# Altium PCB FinalBoard.PcbDoc
Units mil, origin at the board's own origin, x right, y up, seen from the top; angles counter-clockwise.
Board outline 2210 x 1505 mil, 2 copper layers (Top Layer, Bottom Layer); 39 components, 30 nets, 152 pads, 21 vias.
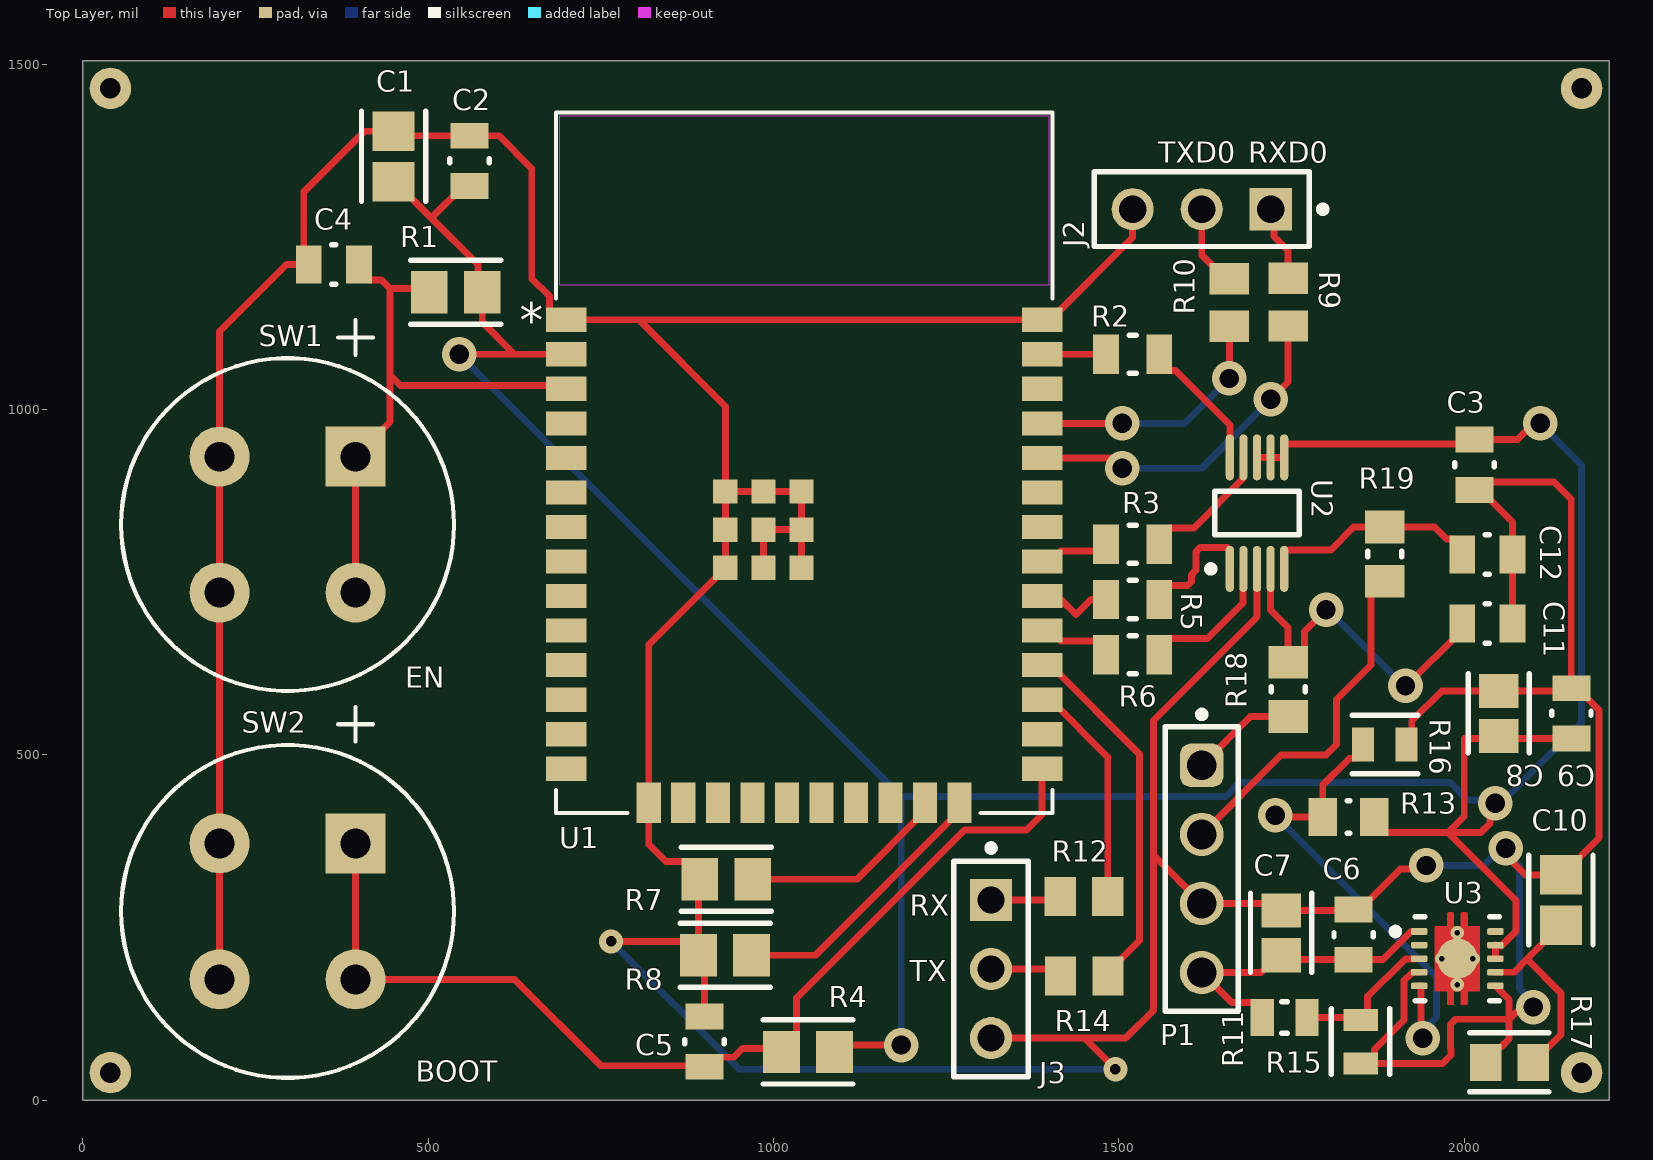
[diagram p0: Top Layer view]
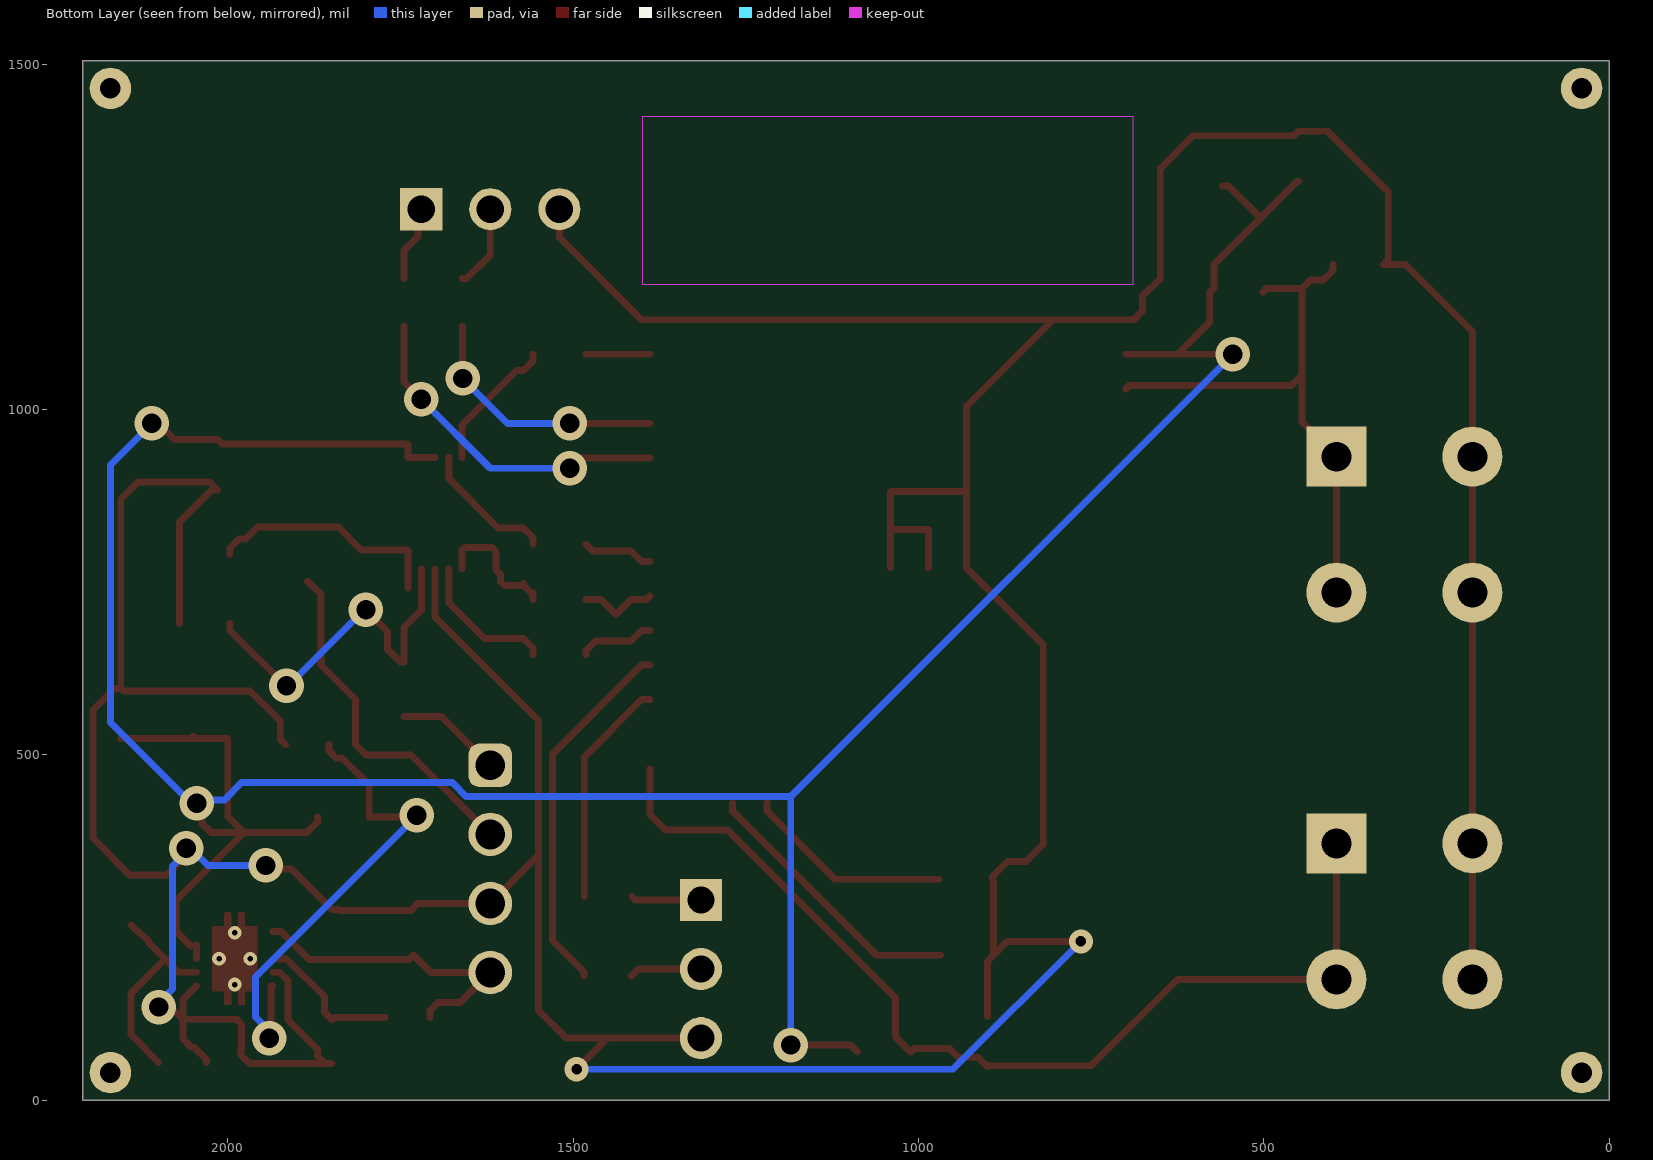
[diagram p1: Bottom Layer view, seen from below]
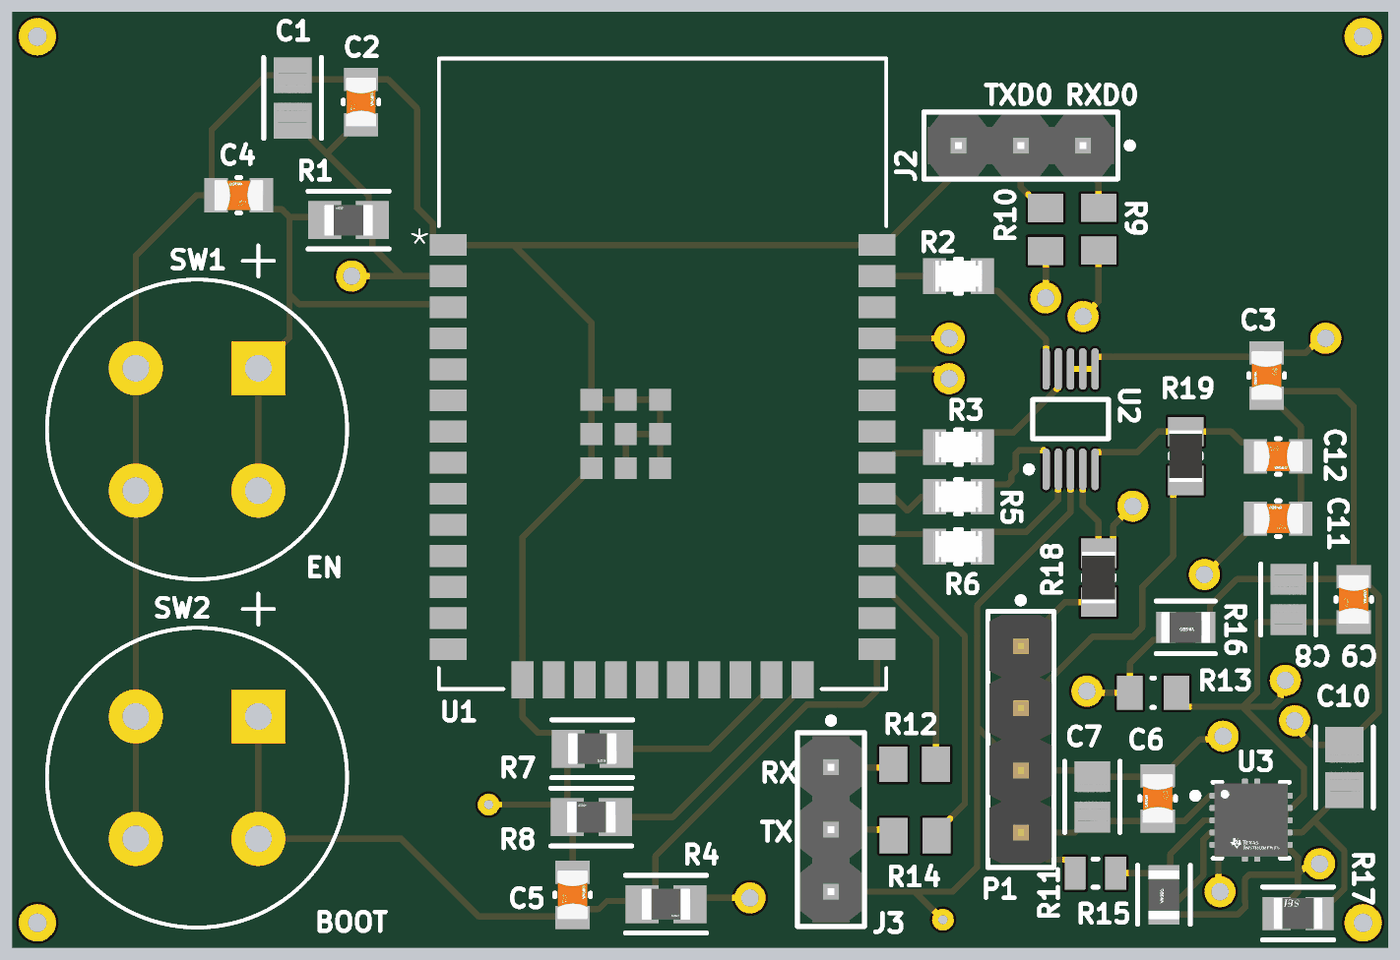
[diagram p2: 3D render of the assembled board from above, using the file's embedded part models]

## Layer stack, top to bottom
Top Solder: solder mask 0.4, Solder Resist, Dk 3.5
Top Layer: signal copper 1.4
Dielectric 1: dielectric 12.6, FR-4, Dk 4.8
Bottom Layer: signal copper 1.4
Bottom Solder: solder mask 0.4, Solder Resist, Dk 3.5

## Board outline
0,0 0,1505 2210,1505 2210,0

## Design rules (kind name [scope] priority, off if disabled: settings)
Clearance [All] p1: gap=5 ignorepadtopadclearanceinfootprint=FALSE
MinimumSolderMaskSliver [All] p1: minsoldermaskwidth=5
PolygonConnect [All] p1: connectstyle=Relief reliefconductorwidth=10 reliefentries=4 polygonreliefangle="90 Angle" airgapwidth=10
RoutingVias [All] p1: holewidth=15 width=35 viastyle="Through Hole" minholewidth=10 minwidth=30 maxholewidth=100 maxwidth=250
SilkToSilkClearance [All] p1: silktosilkclearance=5
SolderMaskExpansion [All] p1: expansion=4 istentingtop=FALSE
SupplyNets "Schematic Supply Nets_2" [InNet('3V3')] p1: voltage=0.000
SupplyNets "Schematic Supply Nets_1" [InNet('5V')] p2: voltage=0.000
SupplyNets "Schematic Supply Nets" [InNet('GND')] p3: voltage=0.000
Width [All] p1: maxlimit=1000 minlimit=5 preferedwidth=10
28 further rules are at their usual default settings.

## Components (designator, comment, footprint, x,y, rotation, side; value= is the part's Value field where it differs from the comment)
C1 "22uF" FP-CL21-IPC_A 450,1366.45 r90 top
C2 "100 nF/.1 uF" FP-CC0805-0_85-MFG 560,1360 r90 top value="100 nF"
C3 "100 nF/.1 uF" FP-CC0805-0_85-MFG 2015,920 r270 top value="100 nF"
C4 "100 nF/.1 uF" FP-CC0805-0_85-MFG 363.58,1210 r180 top value="100 nF"
C5 "100 nF/.1 uF" FP-CC0805-0_85-MFG 900,85 r90 top value="100 nF"
C6 "100 nF/.1 uF" FP-CC0805-0_85-MFG 1840,240 r270 top value="100 nF"
C7 "10uF" FP-CL21-IPC_B 1735,242.51 r270 top
C8 "10uF" FP-CL21-IPC_B 2050,560 r90 top
C9 "100 nF/.1 uF" FP-CC0805-0_85-MFG 2155,560 r90 top value="100 nF"
C10 "4.7uF" FP-CL21-IPC_A 2140,290 r90 top
C11 "1uF" FP-CC0805-0_85-MFG 2033.58,690 r180 top value="1 uF"
C12 "1uF" FP-CC0805-0_85-MFG 2033.58,790 r0 top value="1 uF"
J2 "PREC003SAAN-RC" FP-PREC003SAAN-RC-MFG 1620,1290 r180 top
J3 "PREC003SAAN-RC" FP-PREC003SAAN-RC-MFG 1315,190 r270 top
P1 "61300411121" 61300411121 1620,335 r270 top
R1 "10kR" FP-RR1220-IPC_A 540,1170 r180 top
R2 "50Ohm" FP-D12-CRCW0805-MFG 1520,1080 r0 top
R3 "50Ohm" FP-D12-CRCW0805-MFG 1520,805 r0 top
R4 "10kR" FP-RR1220-IPC_A 1050,70 r0 top
R5 "50Ohm" FP-D12-CRCW0805-MFG 1520,725 r0 top
R6 "50Ohm" FP-D12-CRCW0805-MFG 1520,645 r0 top
R7 "10kR" FP-RR1220-IPC_A 931.59,320 r0 top
R8 "10kR" FP-RR1220-IPC_A 930,210 r180 top
R9 "0R" RESC2013X70X40NL20T20 1745,1155.55 r270 top
R10 "0R" RESC2013X70X40NL20T20 1660,1155 r270 top
R11 "22.6K" RESC2013X50X30LL20T20 1740,120 r0 top
R12 "0R" RESC2013X70X40NL20T20 1449.45,295 r0 top
R13 "1.5 M" RESC0805(2012)_N 1832.6,410 r0 top value="1500000.00 Ohm"
R14 "0R" RESC2013X70X40NL20T20 1450,180 r0 top
R15 "100K" FP-RC0805-0_6-IPC_C 1850,85 r90 top
R16 "100K" FP-RC0805-0_6-IPC_C 1885,515 r180 top
R17 "22.1K" FP-RMCF0805-IPC_B 2065.52,55 r180 top
R18 "1k" RESC2013X60X35ML10T20 1745,595 r270 top
R19 "1k" RESC2013X60X35ML10T20 1885,790.63 r270 top
SW1 "D6R90F1LFS" D6R_CNK 395,931.85 r270 top
SW2 "D6R90F1LFS" D6R_CNK 395,371.85 r270 top
U1 "ESP32-WROOM-32E-N16" ESP32-WROOM-32E_EXP 1044.49,922.91 r0 top
U2 "ADS1018IDGSR" TI-DGS10_N 1700,850 r90 top
U3 "TPS7A9401DSCR" FP-DSC0010J-MFG 1990,205 r0 top

## Footprints (in the part's own frame and the unit in brackets; to place one, negate y for a bottom-side part, rotate by r counter-clockwise, add the part's x,y. Pads: shape width x height; smd on the part's side, far side on the other; paste and mask are expansions set on the pad)
61300411121 [mm] "Pin Header, pitch 2.54 mm, THT, Vertical, single row, 4p"
  rrect50% 1.6x1.6 hole 1.1: 1(-3.81,0)
  round 1.6 hole 1.1: 2(-1.27,0) 3(1.27,0) 4(3.81,0)
  silkscreen extent -5.8,-1.35 5.23,1.35, body extent -5.08,-1.27 5.08,1.27, height 8.57
D6R_CNK [mil]
  rect 87x87 / inner round 60 / far side rect 87x87 hole 43 paste-99999 mask+0: 1(0,0)
  round 87 / inner round 60 / far side round 87 hole 43 paste-99999 mask+0: 2(0,-196.85) 3(196.85,-196.85) 4(196.85,0)
  silkscreen extent -198,-339 339,143
ESP32-WROOM-32E_EXP [mil]
  rect 59x35 smd paste+0 mask+0: 1(-344.49,207.09) 2(-344.49,157.09) 3(-344.49,107.09) 4(-344.49,57.09) 5(-344.49,7.09) 6(-344.49,-42.91) 7(-344.49,-92.91) 8(-344.49,-142.91) 9(-344.49,-192.91) 10(-344.49,-242.91) 11(-344.49,-292.91) 12(-344.49,-342.91) 13(-344.49,-392.91) 14(-344.49,-442.91) 25(344.49,-442.91) 26(344.49,-392.91) 27(344.49,-342.91) 28(344.49,-292.91) 29(344.49,-242.91) 30(344.49,-192.91) 31(344.49,-142.91) 32(344.49,-92.91) 33(344.49,-42.91) 34(344.49,7.09) 35(344.49,57.09) 36(344.49,107.09) 37(344.49,157.09) 38(344.49,207.09)
  rect 35x59 smd paste+0 mask+0: 15(-225,-492.13) 16(-175,-492.13) 17(-125,-492.13) 18(-75,-492.13) 19(-25,-492.13) 20(25,-492.13) 21(75,-492.13) 22(125,-492.13) 23(175,-492.13) 24(225,-492.13)
  rect 35x35 smd paste+0 mask+0: 39(-59.06,-96.85) 40(-114.17,-41.73) 41(-114.17,-96.85) 42(-114.17,-151.97) 43(-59.06,-151.97) 44(-3.94,-151.97) 45(-3.94,-96.85) 46(-3.94,-41.73) 47(-59.06,-41.73)
  Keep-Out Layer region: 354.5,502 -354.5,502 -354.5,258 354.5,258
  silkscreen extent -360,-507 359,507
FP-CC0805-0_85-MFG [mm]
  rect 0.95x1.4 smd paste+0 mask+0: 1(-0.925,0) 2(0.925,0)
  silkscreen extent -0.08,-0.72 0.08,0.72, body extent -1.6,-1.05 1.6,1.05, height 0.25
FP-CL21-IPC_A [mil]
  rect 57.27x61.27 smd paste+0 mask+0: 1(-36.45,0) 2(36.45,0)
  silkscreen extent -65,-46 65,46, body extent -85,-50 85,50, height 10
FP-CL21-IPC_B [mil]
  rect 49.4x57.33 smd paste+0 mask+0: 1(-32.51,0) 2(32.51,0)
  silkscreen extent -57,-44 57,44, body extent -67,-39 67,39, height 10
FP-D12-CRCW0805-MFG [mm]
  rect 0.95x1.45 smd paste+0 mask+0: 1(-0.975,0) 2(0.975,0)
  silkscreen extent -0.13,-0.7 0.13,0.7, body extent -1.55,-0.82 1.55,0.82, height 0.25
FP-DSC0010J-MFG [mm]
  rrect42% 0.6x0.24 smd paste+0 mask+0: 1(-1.4,1) 2(-1.4,0.5) 3(-1.4,0) 4(-1.4,-0.5) 5(-1.4,-1) 6(1.4,-1) 7(1.4,-0.5) 8(1.4,0) 9(1.4,0.5) 10(1.4,1)
  round 1.485 smd paste-1000 mask+0: 11(0,0)
  Top Layer region: -0.375,-1.2 -0.375,-1.65 -0.371,-1.669 -0.36,-1.685 -0.344,-1.696 -0.325,-1.7 -0.325,-1.7 -0.175,-1.7 -0.156,-1.696 -0.14,-1.685 -0.129,-1.669 -0.125,-1.65 -0.125,-1.65 -0.125,-1.2 0.125,-1.2 0.125,-1.65 0.129,-1.669 0.14,-1.685 0.156,-1.696 0.175,-1.7 0.175,-1.7 0.325,-1.7 0.344,-1.696 0.36,-1.685 0.371,-1.669 0.375,-1.65 0.375,-1.65 0.375,-1.2 0.775,-1.2 0.794,-1.196 0.81,-1.185 0.821,-1.169 0.825,-1.15 0.825,-1.15 0.825,1.15 0.818,1.175 0.8,1.193 0.775,1.2 0.775,1.2 0.375,1.2 0.375,1.65 0.368,1.675 0.35,1.693 0.325,1.7 0.325,1.7 0.175,1.7 0.156,1.696 0.14,1.685 0.129,1.669 0.125,1.65 0.125,1.65 0.125,1.2 -0.125,1.2 -0.125,1.65 -0.132,1.675 -0.15,1.693 -0.175,1.7 -0.175,1.7 -0.325,1.7 -0.344,1.696 -0.36,1.685 -0.371,1.669 -0.375,1.65 -0.375,1.65 -0.375,1.2 -0.775,1.2 -0.794,1.196 -0.81,1.185 -0.821,1.169 -0.825,1.15 -0.825,1.15 -0.825,-1.15 -0.821,-1.169 -0.81,-1.185 -0.794,-1.196 -0.775,-1.2 -0.775,-1.2 -0.775,-1.2
  silkscreen extent -2.4,-1.55 1.55,1.55, body extent -1.8,-1.8 1.8,1.8, height 0.25
FP-PREC003SAAN-RC-MFG [mm]
  rect 1.55x1.55 hole 1 paste-2539.97 mask+0: 1(-2.54,0)
  round 1.55 hole 1 paste-2539.97 mask+0: 2(0,0) 3(2.54,0)
  silkscreen extent -4.58,-1.37 3.96,1.37, body extent -4.06,-1.47 4.06,1.47, height 0.25
FP-RC0805-0_6-IPC_C [mil]
  rect 31.82x49.69 smd paste+0 mask+0: 1(-31.57,0) 2(31.57,0)
  silkscreen extent -47,-42 47,42, body extent -51,-31 51,31, height 10
FP-RMCF0805-IPC_B [mil]
  rect 45.46x53.63 smd paste+0 mask+0: 1(-34.48,0) 2(34.48,0)
  silkscreen extent -57,-43 57,43, body extent -67,-37 67,37, height 10
FP-RR1220-IPC_A [mil]
  rect 53.34x61.27 smd paste+0 mask+0: 1(-38.41,0) 2(38.41,0)
  silkscreen extent -65,-46 65,46, body extent -85,-50 85,50, height 10
RESC0805(2012)_N [mm] "Chip Resistor, Body 2.0x1.3mm, IPC Medium Density"
  rect 1.05x1.4 smd: 1(-0.95,0) 2(0.95,0)
  silkscreen extent -0.05,-0.6 0.05,0.6, body extent -1.1,-0.67 1.1,0.68, height 0.7
RESC2013X50X30LL20T20 [mm] "Chip Resistor, 2-Leads, Body 2.00x1.25mm, IPC High Density"
  rect 0.85x1.35 smd: 1(-0.825,0) 2(0.825,0)
  silkscreen extent -0.1,-0.58 0.1,0.58, body extent -1.1,-0.72 1.1,0.72, height 0.5
RESC2013X60X35ML10T20 [mm] "Chip Resistor, 2-Leads, Body 2.1x1.35mm, IPC Low Density"
  rect 1.2x1.45 smd: 1(-1,0) 2(1,0)
  silkscreen extent -0.1,-0.63 0.1,0.63, body extent -1.05,-0.68 1.05,0.67, height 0.6
RESC2013X70X40NL20T20 [mm] "Chip Resistor, 2-Leads, Body 2.00x1.25mm, IPC Medium Density"
  rect 1.15x1.45 smd: 1(-0.875,0) 2(0.875,0)
  body extent -1.1,-0.72 1.1,0.72, height 0.7
TI-DGS10_N [mm] "SOP, 10-Leads, Body 3x3mm, Pitch 0.5mm, IPC Medium Density"
  oval 1.7x0.3 smd: 1(-2.05,1) 2(-2.05,0.5) 3(-2.05,0) 4(-2.05,-0.5) 5(-2.05,-1) 6(2.05,-1) 7(2.05,-0.5) 8(2.05,0) 9(2.05,0.5) 10(2.05,1)
  silkscreen extent -2.17,-1.55 0.8,1.82, body extent -1.55,-1.55 1.55,1.55, height 1.1

## Part data
C1: library part CMP-13271-000185-1, "CL21 Series 0805 22uF 6.3V ±20% Tolerance X5R Multilayer Ceramic Chip Capacitor", Case Code (Imperial)=0805, Case Code (Metric)=2012, Dielectric=X5R, Max Operating Temperature=85°C, Min Operating Temperature=-55°C, Package Quantity=2000, Tolerance=20%, Voltage Rating=6.3V, Capacitance=22uF, Case/Package=0805, Contact Plating=Tin, Depth=1.25mm, Height=1.25mm, Lead Free="Lead Free", Length=2mm, Mount="Surface Mount", Packaging="Tape and Reel", Radiation Hardening=No, Thickness=0.055inch, Voltage Rating (DC)=6.3V, Width=0.049inch
C2 C3 C4 C5 C6 C9: library part CMP-2100-03606-3, "CAP CER 0.1UF 50V X7R 0805", Capacitance="100 nF", Manufacturer=Yageo, Manufacturer Part Number=CC0805KRX7R9BB104, Package=CC0805-0.85, Temperature="-30°C to +85°C", Temperature Characteristic=X7R, Temperature Range High=+85°C, Temperature Range Low=-30°C, Tolerance=0.1, Voltage Rating="50 V", Automotive=No, Category=Cap, ComponentLink2Description=Datasheet, ComponentLink2URL=http://www.yageo.com/documents/recent/UPY-GPHC_Y5V_6.3V-to-50V_8.pdf, Device Class L1="Passive Components", Device Class L2=Capacitors, Device Class L3="Ceramic Capacitors", Digikey Description="CAP CER 0.1UF 50V X7R 0805", Footprint Url=http://www.yageo.com/exep/pages/download/literatures/UPY-C_GEN_24.pdf, Height=0.95mm, Ipc Land Pattern Name=CAPC200125X85, Lead Free=Yes, Material=Ceramic, Mouser Description="Multilayer Ceramic Capacitors MLCC - SMD/SMT 100nF 50V X7R 10%", Octopart=https://octopart.com/cc0805krx7r9bb104-yageo-192993, RoHS=TRUE
C7 C8: library part CMP-2000-06102-2, "CL21 Series 0805 10uF 16V ±10% Tolerance X5R Multilayer Ceramic Chip Capacitor", Case Code (Imperial)=0805, Case Code (Metric)=2012, Dielectric=X7R, Max Operating Temperature=85°C, Min Operating Temperature=-55°C, Package Quantity=1, Tolerance=10%, Voltage=16V, Capacitance=10uF, Case/Package=0805, Depth=1.25mm, Height=1.25mm, Lead Free="Lead Free", Length=2mm, Mount="Surface Mount", Packaging="Tape and Reel", Radiation Hardening=No, Thickness=0.055inch, Voltage Rating=16V, Voltage Rating (DC)=16V, Width=0.049inch
C10: library part CMP-13271-002624-1, "CL21 Series 0805 4.7uF 25V ±10% Tolerance X5R Multilayer Ceramic Chip Capacitor", Case Code (Imperial)=0805, Case Code (Metric)=2012, Dielectric=X5R, Max Operating Temperature=85°C, Min Operating Temperature=-55°C, Package Quantity=1, Tolerance=10%, Voltage Rating=25V, Capacitance=4.7uF, Case/Package=0805, Depth=1.25mm, Height=1.25mm, Lead Free="Lead Free", Length=2mm, Mount="Surface Mount", Packaging="Tape and Reel", Radiation Hardening=No, Thickness=0.055inch, Voltage Rating (DC)=25V, Width=0.049inch
C11 C12: library part CMP-03422-000001-1, "CAP CER 1UF 16V X7R 0805", Capacitance="1 uF", Manufacturer=Yageo, Manufacturer Part Number=CC0805KKX7R7BB105, Package=CC0805-0.85, Temperature="-30°C to +85°C", Temperature Characteristic=X7R, Temperature Range High=+85°C, Temperature Range Low=-30°C, Tolerance=0.1, Voltage Rating="16 V", Automotive=No, Category=Cap, ComponentLink2Description=Datasheet, ComponentLink2URL=http://www.yageo.com/documents/recent/UPY-GPHC_Y5V_6.3V-to-50V_8.pdf, Device Class L1="Passive Components", Device Class L2=Capacitors, Device Class L3="Ceramic Capacitors", Digikey Description="CAP CER 1UF 16V X7R 0805", Footprint Url=http://www.yageo.com/exep/pages/download/literatures/UPY-C_GEN_24.pdf, Height=0.95mm, Ipc Land Pattern Name=CAPC200125X85, Lead Free=Yes, Material=Ceramic, Mouser Description="Multilayer Ceramic Capacitors MLCC - SMD/SMT 1.0uF 16V X7R 10%", Octopart=https://octopart.com/cc0805kkx7r7bb105-yageo-8376555, RoHS=TRUE
J2 J3: library part CMP-00595-22265080-1, "PREC003SAAN-RC Conn Header Vert 3POS 2.54MM", Color=Black, Current Rating=3A, Max Operating Temperature=105°C, Min Operating Temperature=-40°C, Connector Type="Male Pin", Contact Material="Nickel, Tin", Contact Mating Length=5.842mm, Contact Plating=Tin, Height=8.74mm, Mount="Through Hole", NexarPartId=22265080, Number of Contacts=3, Number of Positions=3, Number of Rows=1, Packaging=Bulk, Pitch=2.54mm, RoHS=Compliant, Termination=Solder
P1: library part CMP-1502-01064-3, Color=Black, Contact Resistance=20mΩ, Current Rating=3A, Max Operating Temperature=105°C, Min Operating Temperature=-40°C, Operating Supply Voltage=250V, Connector Type="Male Pin", Contact Material=Copper, Contact Mating Length=5.9944mm, Contact Plating=Gold, Gender=Male, Height=8.89mm, Lead Free="Lead Free", Lead Pitch=2.54mm, Mount="Through Hole", NexarPartId=32855522, Number of Contacts=4, Number of Pins=4, Number of Positions=4, Number of Rows=1, Orientation=Vertical, Packaging=Bulk, Pitch=2.54mm, REACH SVHC=Unknown, RoHS=Compliant, Termination=Solder, Voltage Rating=250V
R1 R4 R7 R8: library part CMP-2001-03215-2, "10kΩ ±0.5% 0.1W 1/10W Chip Resistor 0805 (2012 Metric) Thin Film", Case Code (Imperial)=0805, Case Code (Metric)=2012, Max Operating Temperature=125°C, Max Power Dissipation=100mW, Min Operating Temperature=-55°C, Package Quantity=1, Resistance Tolerance=0.5%, Resistor Type="Thin Film", Temperature Coefficient=25ppm/°C, Voltage Rating=100V, Case/Package=0805, Depth=1.25mm, Height=0.4mm, Lead Free="Lead Free", Length=2mm, Number of Terminations=2, Packaging="Tape and Reel", Power Rating=100mW, Resistance=10kR, RoHS Compliant=Yes, Series=RR, Size Code=0805, Technology="THIN FILM", Termination=SMD/SMT, Tolerance=0.5%, Voltage Rating (DC)=100V, Weight=0.000194oz, Width=1.25mm
R2 R3 R5 R6: library part CMP-00030-21390498-1, "CRCW080550R0FKTA Res Thick Film 0805 50 Ohm 1% 0.125W(1/8W) ±100ppm/C Pad SMD Automotive T/R", Case Code (Imperial)=0805, Case Code (Metric)=2012, Max Operating Temperature=155°C, Min Operating Temperature=-55°C, Power Rating=125mW, Resistance=50Ω, Temperature Coefficient=100ppm/°C, Tolerance=1%, Voltage Rating=150V, Case/Package=0805, Composition="Thick Film", Contact Plating="Lead, Tin", Height=450µm, Lead Free="Contains Lead", Length=2mm, NexarPartId=21390498, RoHS=Non-Compliant, Weight=5.499807mg, Width=1.25mm
R9 R10 R12 R14: library part CMP-1665-00002-5, "Chip Resistor, 0 Ohm, +/- 1%, 0.125 W, -55 to 155 degC, 0805 (2012 Metric), RoHS, Tape and Reel", Case Code (Imperial)=0805, Case Code (Metric)=2012, Max Operating Temperature="155 degC", Min Operating Temperature="-55 degC", Package Quantity=5000, PartNumber=ERJ-6GEY0R00V, Resistance="0 Ohm", Tolerance=5%, Case/Package=0805, ComponentLink1Description="Manufacturer URL", ComponentLink1URL=http://www.panasonic.com/, ComponentLink2Description=Datasheet, ComponentLink2URL=http://industrial.panasonic.com/cdbs/www-data/pdf/RDA0000/AOA0000C84.pdf, DatasheetVersion=03/2015, Height="0.6 mm", Length="2 mm", Mounting Technology="Surface Mount", PackageDescription="2-Pin Surface Mount Device, Body 2 x 1.25 mm", Packaging="Tape and Reel", Radiation Hardening=No, REACH SVHC="No SVHC", RoHSCompliant=True, Width="1.25 mm"
R11: library part CMP-1013-00661-2, Manufacturer="Vishay Dale", Part Number=CRCW080522K6FKEA
R13: library part CMP-1013-00150-1, "1M5 0.125W 5% 0805 (2012 Metric)  SMD", Case-EIA=0805, Case-Metric=2012, Power="0.125 W", Tolerance="5 %", Technology=SMT
R15 R16: library part CMP-2100-03668-5, "RES 100K OHM 1% 1/8W 0805", Case Code (Imperial)=0805, Case Code (Metric)=2012, Max Operating Temperature=155°C, Max Power Dissipation=125mW, Min Operating Temperature=-55°C, Package Quantity=1, Resistance=100kR, Resistance Tolerance=1%, Resistor Type="Thick Film", Temperature Coefficient=100ppm/°C, Voltage Rating=150V, Case/Package=0805, Construction=Rectangular, Depth=1.25mm, Features="Moisture Resistant", Height=0.024inch, Lead Free="Lead Free", Lead Pitch=0.4mm, Length=0.079inch, Military Standard=Not, Number of Pins=2, Number of Terminations=2, Packaging="Tape and Reel", Power Rating=125mW, RoHS Compliant=Yes, Series=RC, Size Code=0805, Technology="THICK FILM", Termination=SMD/SMT, Tolerance=1%, Voltage Rating (DC)=150V, Width=0.049inch
R17: library part CMP-26527-001411-1, "22.1kΩ ±1% 0.125W 0805 Thick Film Chip Resistor AEC-Q200 compliant", Case Code (Imperial)=0805, Case Code (Metric)=2012, Max Operating Temperature=155°C, Max Power Dissipation=125mW, Min Operating Temperature=-55°C, Resistance=22.1kR, Resistor Type="Thick Film", Temperature Coefficient=100ppm/°C, Tolerance=1%, Case/Package=0805, Construction=Rectangular, Contact Plating=Tin, Depth=1.25mm, Features="Automotive AEC-Q200", Height=0.026inch, Lead Free="Lead Free", Length=0.079inch, Military Standard=Not, Mount="Surface Mount", Number of Terminations=2, Packaging="Tape and Reel", Power Rating=125mW, Radiation Hardening=No, RoHS Compliant=Yes, Series=RMCF, Size Code=0805, Width=0.049inch
R18 R19: library part CMP-2100-03671-1, "Chip Resistor, 1 KOhm, +/- 1%, 125 mW, -55 to 155 degC, 0805 (2012 Metric), RoHS, Tape and Reel", Case Code (Imperial)=0805, Case Code (Metric)=2012, Manufacturer=Yageo, Max Operating Temperature=155degC, Max Power Dissipation=125mW, Min Operating Temperature=-55degC, Package Description="2-Pin Surface Mounted Device, Body 2 x 1.25 mm", Package Quantity=1, Resistance=1KOhm, Temperature Coefficient=100ppm/degreesC, Tolerance=1%, Voltage Rating=150V, Case/Package=0805, Composition=ThickFilm, Datasheet URL=http://www.yageo.com/NewPortal/yageodocoutput?fileName=/pdf/R-Chip/PYu-RC_Group_51_RoHS_L_5.pdf, Datasheet Version="Rev. 5, 10/2016", Depth=1.25mm, Height=0.024inch, Lead Free=LeadFree, Length=0.079inch, Manufacturer URL=http://www.yageo.com/, Military Standard=Not, Number of Pins=2, Number of Terminations=2, Package Reference=0805, Packaging=TapeandReel, Power Rating=125mW, REACH SVHC=Unknown, RoHSCompliant=true, Termination=SMD/SMT, Voltage Rating (DC)=150V, Width=0.049inch
SW1 SW2: "No Description Available", Mfr_Name="C&K Components", RefDes=RefDes, Type=Type
U1: "No Description Available", Mfr_Name="Espressif Systems", RefDes=RefDes, Type=RF
U2: library part CMP-0003-00373-2, "12-Bit ADC with Integrated MUX, PGA, Temperature Sensor, Oscillator and Reference, -40 to 125 degC, 10-pin SOP (DGS10), Green (RoHS & no Sb/Br)", Analog Voltage AV/DD(Max)(V)=5.5, Analog Voltage AV/DD(Min)(V)=2, Manufacturer="Texas Instruments", # Input Channels=4, Architecture=Delta-Sigma, Code_JEDEC=MO-153, ComponentLink1Description="Manufacturer URL", ComponentLink1URL=http://www.ti.com/, ComponentLink2Description=Datasheet, ComponentLink2URL=http://www.ti.com/lit/ds/symlink/ads1018.pdf, ComponentLink3Description="Package Specification", ComponentLink3URL=http://www.ti.com/lit/ml/mpds035b/mpds035b.pdf, DatasheetVersion=SBAS526A, Digital Supply(Max)(V)=5.5, Digital Supply(Min)(V)=2, Eco-Plan="Green (RoHS & no Sb/Br)", INL(Max)(+/-LSB)=0.5, Interface="Serial SPI", Mounting Technology="Surface Mount", PackageDescription="10-Pin Plastic Small Outline, Body 3 x 3 mm, Pitch 0.5 mm", PackageReference=DGS10, PackageVersion="4073272/C, 02/2004", PartNumber=ADS1018IDGSR, Resolution(Bits)=12, Sample Rate(max)(SPS)=3.3k, SubFamily="Precision ADC (<=10MSPS)"
U3: library part CMP-04917-000380-1, "1-A, ULTRA-LOW NOISE, ULTRA-HIGH"

## Free pads (board coordinates)
  round 60 hole 30: 2(2170,1465) 3(40,1465) 4(40,40) 5(2170,40)

## Via types
v1: diameter 50, hole 28, Top Layer to Bottom Layer, 15 vias
v2: diameter 19.68, hole 7.87, Top Layer to Bottom Layer, 4 vias
v3: diameter 35, hole 15, Top Layer to Bottom Layer, 2 vias

## Nets (pads, with @x,y where several pads share a name; then routed paths per layer and width w, separated by ;. In a path a pad name is that pad's centre, name@x,y a point inside that pad or via, vN(x,y) a via of type N, cw(c..) or ccw(c..) an arc to the next point about the centre after c; other vN are vias at no path point)
3V3: C1.1 C2.1 C3.1 C8.1 C9.1 R1.1 R4.2 R13.2 U1.2 U2.6 U2.7 U2.8 U3.8 U3.9 | length 4631.1
  Top Layer w10: C1.1 452,1330 506,1276 ; v1(545,1080) 625,1080 ; C2.1 551.14,1323.58 506,1278.44 506,1276 ; U1.2 625,1080 ; R4.2 1098.41,80 v1(1185,80) ; U2.8 U2.7 U2.6 1739.37,949.16 1740.21,950 2008.58,950 C3.1 2077.01,956.42 2100.6,980 v1(2110,980) ; R13.2 1870,403.11 1885.67,387.44 1976.7,387.44 ; v1(2045,430) 2037.35,422.35 2037.35,400.87 2023.92,387.44 1976.7,387.44 ; U3.8 U3.9 ; C8.1 C8.1@2053.91,523.58 ; U3.9@2053.58,223.31 2075,244.72 2075,289.14 1976.7,387.44 ; C9.1 2000,523.58 2000,410.74 1976.7,387.44 ; 506,1276 572.22,1209.78 572.22,1176.19 R1.1 578.41,1126.59 625,1080
  Bottom Layer w10: v1(545,1080) 1185,440 ; v1(1185,80) 1185,440 ; v1(2110,980) 2170,920 2170,547.15 2052.85,430 v1(2045,430) 2040,435 2005,435 1980,460 1675,460 1655,440 1185,440
5V: C6.2 C7.2 P1.4 R11.1 U3.1 | length 465
  Top Layer w10: R11.1 1707.52,129.84 1695.79,141.57 1663.43,141.57 P1.4 1706.03,185 1731.03,210 1737.45,203.58 C6.2 1882.56,203.58 1923.07,244.09 1934.61,244.09 U3.1
GND: C1.2 C2.2 C3.2 C4.2 C5.2 C6.1 C7.1 C8.2 C9.2 C10.2 C11.1 C12.2 J2.3 J3.3 P1.3 R7.1 R8.2 R15.1 R16.1 R17.2 SW1.2 SW1.3 SW2.2 SW2.3 U1.1 U1.15 U1.38 U1.39 U1.40 U1.41 U1.42 U1.43 U1.44 U1.45 U1.46 U1.47 U2.3 U3.4 U3.6 | length 8965.4
  Top Layer w10: SW2.3 SW2.2 SW1.3 SW1.2 198.15,1113.15 295,1210 C4.2 320,1217.17 320,1315 407.9,1402.9 C1.2 456.48,1396.42 C2.2 602.72,1396.42 650,1349.14 650,1190 675.5,1164.5 675.5,1142.5 688,1130 U1.1 805,1130 ; v3(765,230) 871.59,230 R8.2 ; C5.2 900,201.59 R8.2 ; U1.43 U1.39 U1.45 ; U1.44 U1.45 ; J3.3 1445,90 ; v3(1495,45) 1450,90 1445,90 ; J2.3 1520,1249.02 1400.98,1130 U1.38 805,1130 ; U2.3 1700,700 1550,550 1550,355 ; R15.1 R15.1@1858.94,53.43 ; R16.1 1923.99,522.41 1923.99,548.99 1967.51,592.51 C8.2 2151.09,592.51 C9.2 ; v1@1930,335 1907.44,335 1848.86,276.42 C6.1 1838.6,275.02 C7.1 1725.02,285 P1.3 1550,355 ; U3.4 1925.05,185.32 1913.07,173.33 1913.07,116.5 1869.85,73.27 1869.85,64.33 R15.1@1858.94,53.43 ; R17.2 2031.04,59.08 2048.77,76.81 2052.85,76.81 2065,88.96 2065,117.35 ; U3.6 2065,145.75 2065,117.35 ; v1@2060,355 2088.55,326.45 C10.2 2142,326.45 2195,379.45 2195,565.28 2163.86,596.42 C9.2 ; C11.1 C12.2 2070,837.44 2023.86,883.58 C3.2 2026.42,895 2130,895 2155,870 C9.2 ; v1@2085,130 2077.65,130 2065,117.35 ; 805,1130 930.32,1004.68 U1.40 ; R8.2 891.59,318.41 R7.1 893.18,323.96 871.51,345.63 844.37,345.63 819.49,370.51 U1.15 819.49,660.12 U1.42 U1.41 U1.40 ; U1.40 U1.47 U1.46 U1.45 ; 1445,90 1510,90 1550,130 1550,355 ; R15.1@1858.94,53.43 1968.43,53.43 1980.86,65.86 1980.86,74.14 1980,75 1980,110 1987.35,117.35 2065,117.35
  Bottom Layer w10: v3(765,230) 950,45 v3(1495,45) ; v1(1945,340) 2028.43,340 2053.43,365 v1(2060,365) 2060,359.14 2080,339.14 2080,160.86 2100,140.86 v1(2100,135)
NetC4_1: C4.1 R1.2 SW1.1 SW1.4 U1.3 | length 847.3
  Top Layer w10: SW1.4 SW1.1 445,981.85 445,1050 ; C4.1 400,1201.14 413.7,1187.44 432.56,1187.44 445,1175 ; R1.2 496.59,1175 445,1175 ; U1.3 695,1035 460,1035 445,1050 ; 445,1050 445,1175
NetC5_1: C5.1 R4.1 SW2.1 SW2.4 U1.25 | length 1497.9
  Top Layer w10: SW2.1 SW2.4 625,175 750,50 898.58,50 C5.1 913.7,62.28 942.28,62.28 955,75 1006.59,75 R4.1 1033.26,91.67 1033.26,148.26 1276.29,391.29 1366.29,391.29 1388.98,413.98 U1.25
NetC10_1: C10.1 R17.1 U3.7 | length 310
  Top Layer w10: U3.7 2071.76,185.32 2090.72,204.28 ; R17.1 2140,95 2140,155 2090.72,204.28 ; C10.1@2129,244.55 2114.37,229.92 2114.37,227.92 2090.72,204.28 ; C10.1@2130,243.55 C10.1
NetC11_2: C11.2 R18.1 U2.4 | length 531.9
  Top Layer w10: U2.4 1719.68,709.77 1745,684.46 R18.1 1749.92,634.37 1768.54,652.99 1768.54,678.54 v1(1800,710) ; v1(1915,600) 1916.02,600 1997.17,681.14 C11.2
  Bottom Layer w10: v1(1800,710) 1802.5,710 1912.5,600 v1(1915,600)
NetC12_1: C12.1 R19.1 U2.5 | length 352.8
  Top Layer w10: U2.5@1739.37,741.73 1739.37,796.01 1740.21,796.85 1806.85,796.85 1840,830 R19.1 ; R19.1@1880.08,830 1957.17,830 1974.61,812.56 1983.46,812.56 1997.17,798.86 C12.1
NetJ2_1: J2.1 R9.1 | length 110.4
  Top Layer w10: J2.1 1724.65,1285.35 1724.65,1250.35 1745,1230 R9.1
NetJ2_2: J2.2 R10.1 | length 120.6
  Top Layer w10: J2.2 1620,1223.54 1654.09,1189.45 R10.1
NetJ3_1: J3.1 R12.1 | length 102.1
  Top Layer w10: J3.1 1410,290 R12.1
NetJ3_2: J3.2 R14.1 | length 104.7
  Top Layer w10: J3.2 1405.55,190 R14.1
NetP1_1: P1.1 R18.2 | length 154.3
  Top Layer w10: P1.1 1690.63,555.63 R18.2
NetP1_2: P1.2 R19.2 | length 514.9
  Top Layer w10: P1.2 1735,500 1800,500 1815,515 1815,580 1865,630 1865,732.64 1883.62,751.26 R19.2
NetR2_1: R2.1 U1.37 | length 92.6
  Top Layer w10: U1.37 R2.1
NetR2_2: R2.2 U2.10 | length 197.4
  Top Layer w10: R2.2 1558.39,1070.16 1572.09,1056.46 1581.93,1056.46 1660.63,977.76 U2.10
NetR3_1: R3.1 U1.31 | length 103
  Top Layer w10: U1.31 1400.98,780 1415.98,795 1471.61,795 R3.1
NetR3_2: R3.2 U2.9 | length 197.6
  Top Layer w10: R3.2 1558.39,814.84 1572.09,828.54 1608.52,828.54 1679.97,899.99 1679.97,930.36 U2.9
NetR5_1: R5.1 U1.30 | length 112.9
  Top Layer w10: U1.30 1393.98,725 1415.89,725 1437.8,703.09 1459.7,725 R5.1
NetR5_2: R5.2 U2.1 | length 196.8
  Top Layer w10: R5.2@1558.39,734.84 R5.2 1558.39,731.3 1572.09,745 1599.14,745 1605,750.86 1605,760.86 1611.72,767.57 1611.72,794.14 1617.57,800 1656.99,800 1660.63,796.36 U2.1
NetR6_1: R6.1 U1.29 | length 110.8
  Top Layer w10: U1.29 1400.98,680 1415.98,665 1467.91,665 1481.61,651.3 R6.1
NetR6_2: R6.2 U2.2 | length 207.9
  Top Layer w10: R6.2 1558.39,654.84 1572.09,668.54 1628.54,668.54 1679.97,719.97 1679.97,768.94 U2.2
NetR7_2: R7.2 U1.23 | length 302.4
  Top Layer w10: R7.2 1120.7,320 1219.49,418.79 U1.23
NetR8_1: R8.1 U1.24 | length 399.6
  Top Layer w10: R8.1 1060.7,210 1269.49,418.79 U1.24
NetR11_2: R11.2 R15.2 U3.3 | length 206.8
  Top Layer w10: R11.2 1845.51,120 1848.94,116.57 1849.24,116.57 1860.15,127.48 1860.15,150.15 1914.72,204.72 U3.3@1928.07,204.72
NetR13_1: R13.1 R16.2 U3.5 | length 711.2
  Top Layer w10: v1@1725,410 R13.1 1795.2,456.77 1833.58,495.15 1842.52,495.15 1853.43,506.06 R16.2 ; U3.5 1937.17,165.63 1937.44,165.35 1937.44,92.56 v1(1940,90)
  Bottom Layer w10: v1(1726.25,412.47) 1960,178.73 1960,120.82 1940,100.82 v1(1940,90)
RXD0: R9.2 U1.34 | length 483.9
  Top Layer w10: U1.34 v1@1500,930 ; v1(1720,1015) 1745,1040 R9.2
  Bottom Layer w10: v1(1505,915) 1620,915 v1(1720,1015)
RXD1: R12.2 U1.27 | length 331.3
  Top Layer w10: U1.27 1400.98,580 1483.9,497.08 R12.2
TXD0: R10.2 U1.35 | length 373.5
  Top Layer w10: U1.35 v1(1505,980) ; v1(1660,1045) R10.2
  Bottom Layer w10: v1(1505,980) 1595,980 v1(1660,1045)
TXD1: R14.2 U1.28 | length 534.3
  Top Layer w10: U1.28 1400.98,630 1530,500.98 1530,231.46 1484.45,185.91 R14.2
pads on no net: U1.4 U1.5 U1.6 U1.7 U1.8 U1.9 U1.10 U1.11 U1.12 U1.13 U1.14 U1.16 U1.17 U1.18 U1.19 U1.20 U1.21 U1.22 U1.26 U1.32 U1.33 U1.36 U3.2 U3.10 U3.11
copper on no net:
  other v2: 1990,167.6 1967.36,205 2012.64,205 1990,242.4

## Silkscreen, mask and mechanical layers (free items; w line width, h text height)
Top Overlay:
  text "TXD0" at 1557,1357 h30
  text "RXD0" at 1687,1357 h30
  text "EN" at 467,597 h30
  text "RX" at 1197,267 h30
  text "TX" at 1197,172 h30
  text "BOOT" at 482,27 h30
Mechanical 1:
  the board outline again, w10

## Text inside footprints (layer, text, board x,y; h text height)
U1: Top 3D Body "*" at 742,1105 h50; Top Overlay "*" at 633,1105 h50